# Altium PCB SIC18102  V1 8电极6005_20180920.PcbDoc (part 3 of 3)
Units mm, origin at the board's own origin, x right, y up, seen from the top; angles counter-clockwise.
Board outline 116 x 63 mm, 2 copper layers (Top Layer, Bottom Layer); 179 components, 127 nets, 387 pads, 294 vias.
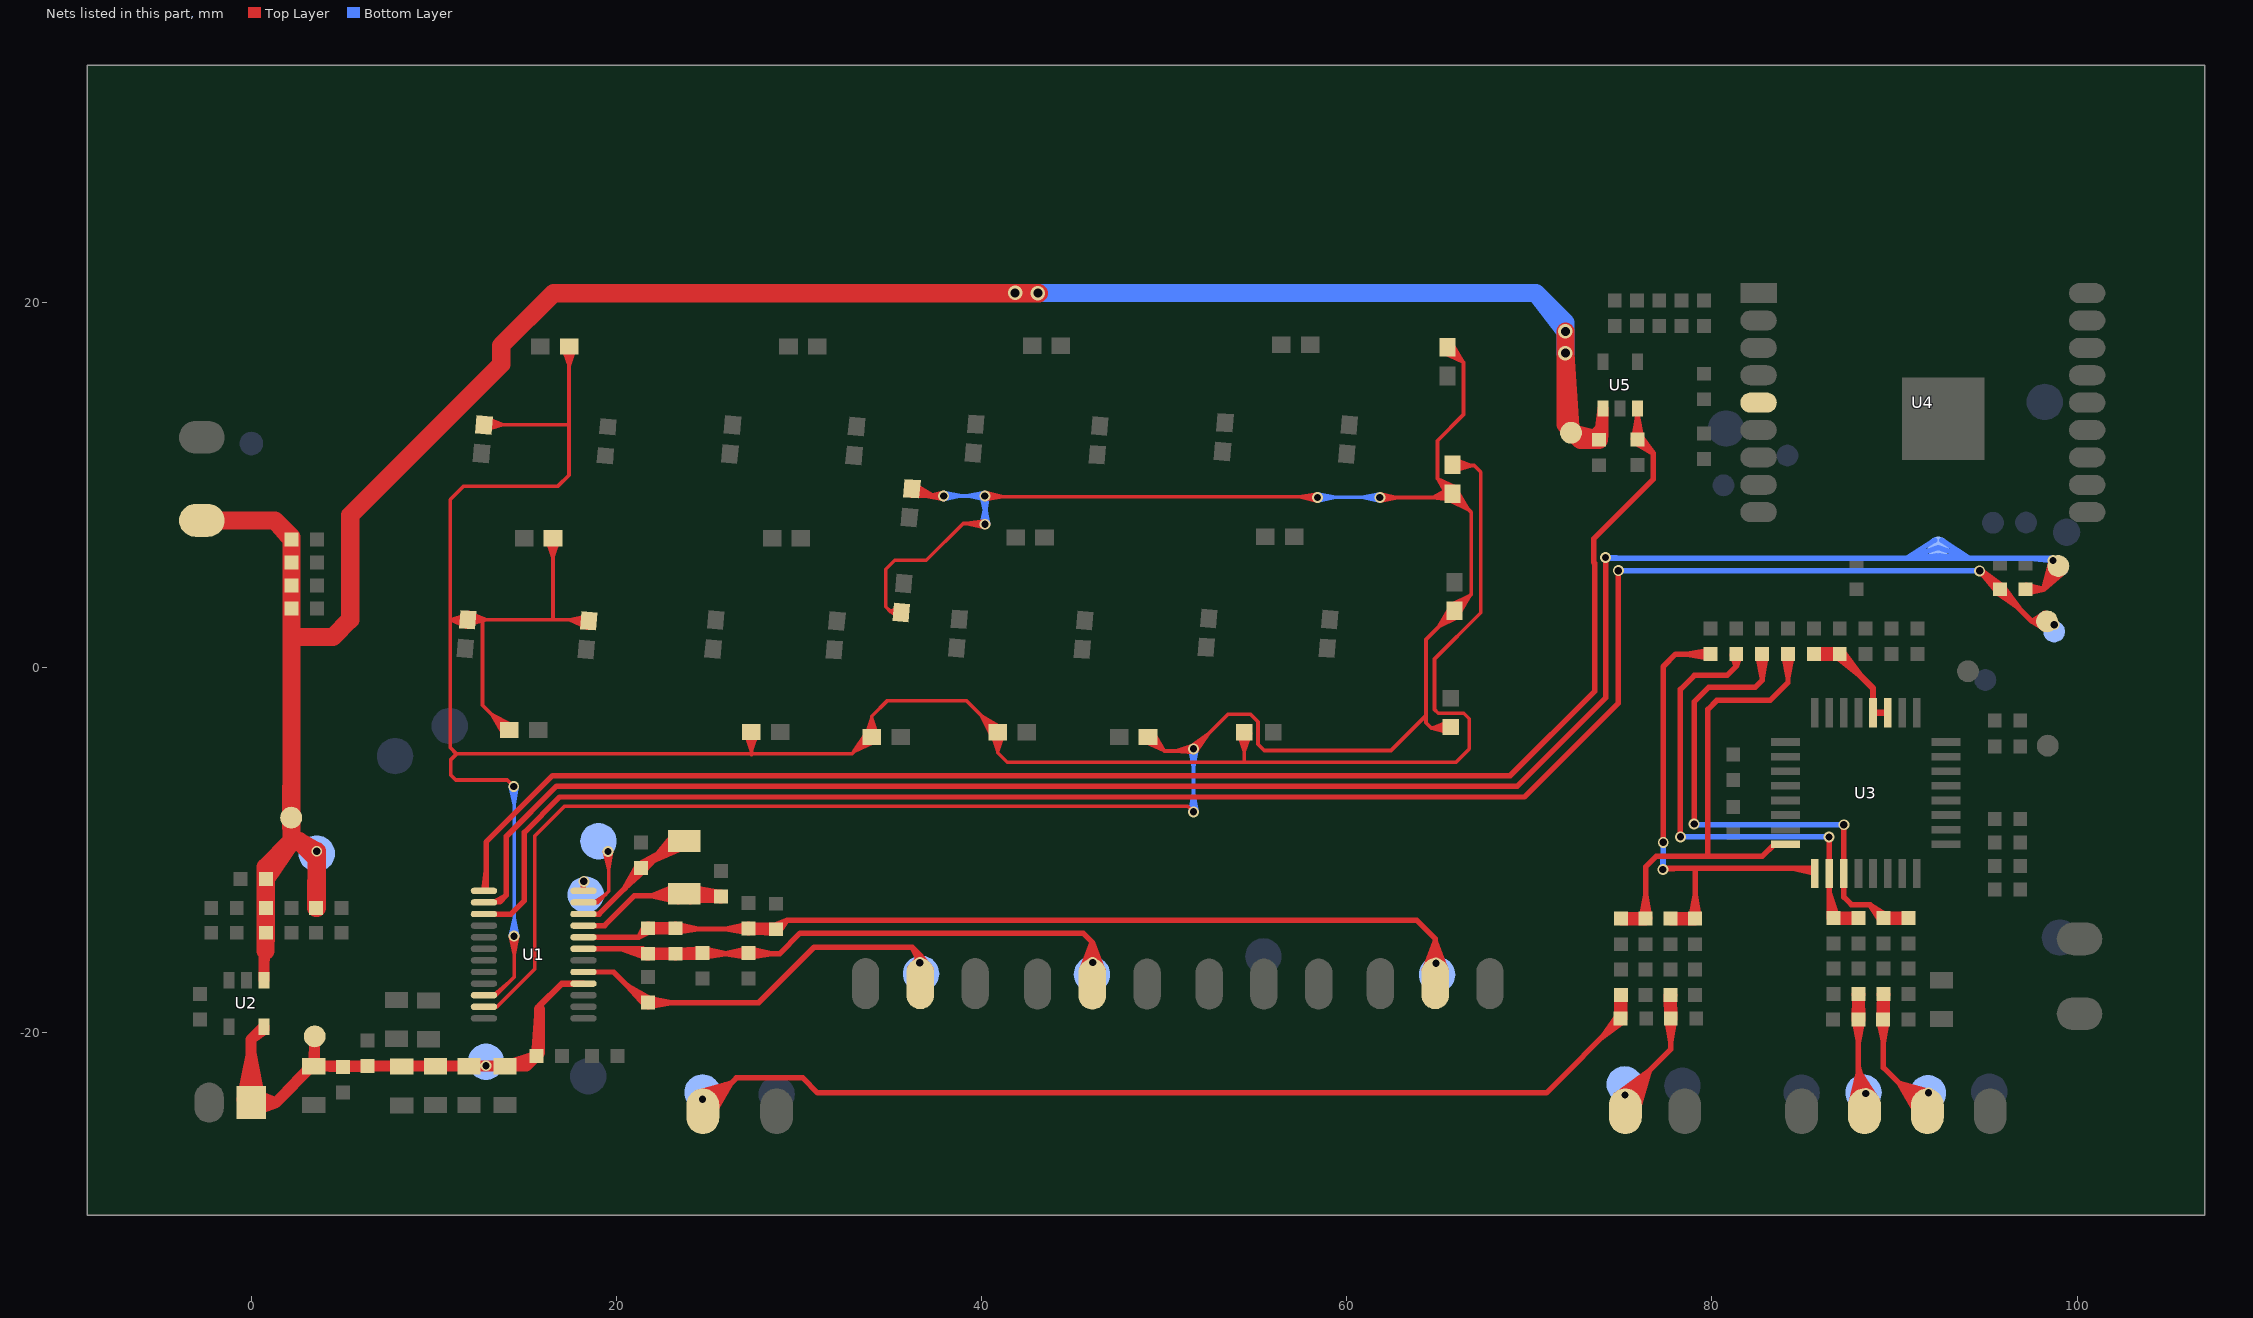
[diagram p3: the nets of this part, all layers, seen from the top]

## Via types
v1: diameter 0.6, hole 0.4, Top Layer to Bottom Layer, 288 vias
v2: diameter 0.8, hole 0.5, Top Layer to Bottom Layer, 4 vias
v3: diameter 0.5, hole 0.3, Top Layer to Bottom Layer, 2 vias

## Nets (pads, with @x,y where several pads share a name; then routed paths per layer and width w, separated by ;. In a path a pad name is that pad's centre, name@x,y a point inside that pad or via, vN(x,y) a via of type N, cw(c..) or ccw(c..) an arc to the next point about the centre after c; other vN are vias at no path point) (continued)
PT26: LED7.K LED15.K LED31.K LED39.K LED41.A LED42.A LED44.A LED45.A LED46.A LED47.K LED56.A U1.22 | length 234.3
  Top Layer w0.2: LED45.A@11.758,2.218 10.89,2.614 ; LED45.A@11.802,2.894 10.89,2.614 ; LED45.A@11.822,2.409 10.89,2.614 ; LED45.A@11.841,2.697 10.89,2.614 ; LED45.A@11.842,2.552 10.89,2.614 ; LED45.A@11.853,2.679 12.894,2.614 ; LED45.A@11.854,2.534 12.894,2.614 ; LED45.A@11.872,2.822 12.894,2.614 ; LED45.A@11.889,2.336 12.894,2.614 ; LED45.A@11.931,3.014 12.894,2.614 ; LED42.A@12.597,13.29 LED42.A@12.74,13.29 ; 12.66,2.54 12.66,-2.06 14.02,-3.42 LED47.K@14.12,-3.42 ; U1.22@12.74,-17.945 13.405,-17.945 14.39,-16.96 v1(14.39,-14.71) ; LED42.A@12.74,13.156 LED42.A@12.74,13.29 ; LED42.A@12.746,13.353 13.786,13.29 ; LED42.A@12.747,13.209 13.786,13.29 ; LED42.A@12.764,13.497 13.786,13.29 ; LED42.A@12.782,13.011 13.786,13.29 ; LED42.A@12.823,13.689 13.786,13.29 ; LED42.A@12.859,13.171 LED42.A@12.74,13.29 ; U1.22@13.29,-17.945 14.12,-17.23 ; LED47.K@13.785,-3.632 13.184,-2.584 ; LED47.K@13.95,-3.518 13.184,-2.584 ; LED47.K@14.056,-3.42 13.184,-2.584 ; LED47.K@14.15,-3.31 13.184,-2.584 ; v1@14.191,-14.73 14.39,-15.712 ; LED47.K@14.257,-3.14 13.184,-2.584 ; v1(14.37,-6.51) 14.02,-6.16 11.19,-6.16 10.93,-5.9 10.93,-5.04 11.24,-4.73 ; v1@14.39,-14.68 v1(14.39,-14.71) ; v1@14.589,-14.73 14.39,-15.712 ; LED44.A@16.18,7.023 16.52,6.036 ; LED44.A@16.376,7.07 16.52,6.036 ; LED44.A@16.664,7.07 16.52,6.036 ; LED44.A@16.86,7.023 16.52,6.036 ; LED41.A@17.06,17.523 17.4,16.536 ; LED41.A@17.256,17.57 17.4,16.536 ; 17.35,13.29 LED42.A@12.74,13.29 ; LED41.A@17.544,17.57 17.4,16.536 ; LED41.A@17.74,17.523 17.4,16.536 ; LED46.A@18.38,2.165 17.431,2.614 ; LED46.A@18.448,2.355 17.431,2.614 ; LED46.A@18.456,2.841 17.431,2.614 ; LED46.A@18.474,2.497 17.431,2.614 ; LED46.A@18.48,2.56 18.426,2.614 16.589,2.614 ; LED46.A@18.481,2.641 17.431,2.614 ; LED39.K@27.05,-3.581 27.39,-4.568 ; LED39.K@27.246,-3.534 27.39,-4.568 ; 27.39,-4.77 27.39,-4.73 ; LED39.K@27.534,-3.534 27.39,-4.568 ; LED39.K@27.73,-3.581 27.39,-4.568 ; LED15.K@33.64,-3.753 33.98,-2.766 ; LED15.K@33.656,-3.585 32.995,-4.615 ; LED15.K@33.68,-3.93 32.88,-4.73 27.39,-4.73 ; LED15.K@33.815,-3.707 32.995,-4.615 ; LED15.K@33.836,-3.8 33.98,-2.766 ; LED15.K@33.917,-3.81 32.995,-4.615 ; LED15.K@33.98,-3.81 33.98,-2.67 34.84,-1.81 39.15,-1.81 LED31.K@40.88,-3.54 ; LED15.K@34.005,-3.924 32.995,-4.615 ; LED15.K@34.104,-4.099 32.995,-4.615 ; LED15.K@34.124,-3.8 33.98,-2.766 ; LED15.K@34.32,-3.753 33.98,-2.766 ; LED31.K@40.532,-3.735 40.011,-2.671 ; LED31.K@40.54,-3.597 40.88,-4.584 ; LED31.K@40.705,-3.632 40.011,-2.671 ; LED31.K@40.736,-3.55 40.88,-4.584 ; LED31.K@40.816,-3.54 40.011,-2.671 ; LED31.K@40.916,-3.435 40.011,-2.671 ; LED31.K@41.024,-3.55 40.88,-4.584 ; LED31.K@41.032,-3.272 40.011,-2.671 ; LED31.K@41.22,-3.597 40.88,-4.584 ; LED7.K@54.049,-3.597 54.388,-4.584 ; LED7.K@54.244,-3.55 54.388,-4.584 ; LED7.K@54.533,-3.55 54.388,-4.584 ; LED7.K@54.728,-3.597 54.388,-4.584 ; LED56.A@65.79,11.1 66.835,11.065 ; LED56.A@65.795,10.956 66.835,11.065 ; LED56.A@65.805,11.244 66.835,11.065 ; LED56.A@65.835,10.758 66.835,11.065 ; LED56.A@65.858,11.438 66.835,11.065 ; LED56.A@65.882,11.065 66.98,11.065 67.339,10.706 67.339,3.009 64.799,0.469 64.799,-2.295 65.004,-2.5 66.405,-2.5 66.704,-2.799 66.704,-4.456 65.98,-5.18 54.35,-5.18 ; 10.89,2.614 16.589,2.614 ; 10.89,2.614 10.89,9.2 11.628,9.938 16.798,9.938 17.4,10.54 LED41.A@17.4,17.58 17.4,16.536 ; 10.89,2.614 10.89,-4.38 11.24,-4.73 ; 11.24,-4.73 27.39,-4.73 ; 14.39,-15.712 v1(14.39,-14.71) ; 16.52,6.036 LED44.A@16.52,7.08 16.52,2.683 16.589,2.614 ; 27.39,-4.73 LED39.K@27.39,-3.524 27.39,-4.568 ; 40.88,-4.584 LED31.K@40.88,-3.54 ; LED31.K@40.88,-3.54 40.88,-4.66 41.4,-5.18 54.35,-5.18 ; 54.35,-5.18 54.388,-5.141 LED7.K@54.388,-3.54 54.388,-4.584
  Bottom Layer w0.2: v1@14.171,-6.534 14.39,-7.512 ; v1@14.191,-14.69 14.39,-13.708 v1@14.589,-14.69 ; v1(14.37,-6.51) 14.39,-7.512 ; v1(14.39,-14.71) v1@14.39,-6.5 ; v1@14.569,-6.526 14.39,-7.512
PT27: LED8.K LED16.K LED32.K LED49.A LED52.A LED53.A LED56.K U1.23 | length 231
  Top Layer w0.2: U1.23@12.74,-18.58 13.45,-18.58 15.52,-16.51 15.52,-9.22 17.15,-7.59 51.29,-7.59 v1(51.6,-7.9) ; LED32.K@35.472,2.7 35.01,3.07 ; LED32.K@35.528,3.357 35.01,3.07 ; LED32.K@35.57,2.879 35.01,3.07 ; LED32.K@35.595,3.164 35.01,3.07 ; LED32.K@35.6,3.02 35.01,3.07 ; LED32.K@35.66,3.07 35.01,3.07 ; LED52.A@36.126,9.391 37.41,9.39 ; LED52.A@36.142,9.591 37.41,9.39 ; LED52.A@36.172,9.732 37.41,9.39 ; LED52.A@36.178,9.682 36.47,9.39 v1@37.99,9.39 ; LED52.A@36.219,9.869 37.41,9.39 ; LED52.A@36.308,10.049 37.41,9.39 ; v1@37.898,9.599 36.918,9.39 ; v1@37.902,9.201 36.918,9.39 ; v1(37.92,9.4) 36.918,9.39 ; v1@40.05,7.89 38.99,7.89 36.97,5.87 35.24,5.87 34.75,5.38 34.75,3.33 35.01,3.07 ; v1@40.152,7.652 39.177,7.89 ; v1@40.168,8.05 39.177,7.89 ; v1(40.17,9.4) 41.177,9.353 ; v1(40.18,7.85) 39.177,7.89 ; v1@40.181,9.2 41.177,9.353 ; v1@40.199,9.598 41.177,9.353 ; v1@40.379,9.353 v1@58.38,9.353 ; LED49.A@48.982,-4.096 50.004,-4.574 ; LED49.A@49.083,-3.922 50.004,-4.574 ; LED49.A@49.174,-3.81 50.004,-4.574 ; LED49.A@49.278,-3.71 50.004,-4.574 ; LED49.A@49.32,-3.89 50.004,-4.574 ; LED49.A@49.443,-3.595 50.004,-4.574 ; v1@51.471,-4.297 52.427,-3.625 ; v1@51.557,-4.255 50.583,-4.574 ; v1@51.605,-4.65 50.583,-4.574 ; v1@51.753,-4.579 52.427,-3.625 ; v1@58.369,9.121 57.393,9.353 ; v1@58.383,9.519 57.393,9.353 ; v1(58.396,9.319) 57.393,9.353 ; v1(61.81,9.31) 65.582,9.31 LED56.K@65.79,9.518 ; v1@61.83,9.111 62.812,9.31 v1@61.83,9.509 ; LED53.A@65.321,17.2 66.386,16.705 ; LED53.A@65.421,17.375 66.386,16.705 ; LED53.A@65.51,17.488 66.386,16.705 ; LED53.A@65.51,17.552 65.539,17.552 66.388,16.703 66.388,13.855 64.962,12.429 64.962,10.346 ; LED56.K@65.52,9.367 64.962,10.346 ; LED56.K@65.595,9.171 66.659,8.65 ; LED53.A@65.613,17.59 66.386,16.705 ; LED8.K@65.619,-2.929 64.649,-3.311 ; LED16.K@65.631,3.254 65.03,2.233 ; LED8.K@65.651,-3.599 64.649,-3.311 ; LED8.K@65.674,-3.123 64.649,-3.311 ; LED56.K@65.675,9.843 64.682,9.31 ; LED56.K@65.685,9.482 64.962,10.346 ; LED8.K@65.688,-3.402 64.649,-3.311 ; LED8.K@65.691,-3.262 64.649,-3.311 ; LED8.K@65.695,-3.262 65.646,-3.311 64.621,-3.311 64.332,-3.022 64.332,-2.629 ; LED56.K@65.698,9.343 66.659,8.65 ; LED16.K@65.704,3.45 66.768,3.971 ; LED56.K@65.754,9.658 64.682,9.31 ; LED53.A@65.775,17.708 66.386,16.705 ; LED56.K@65.79,9.455 66.659,8.65 ; LED56.K@65.79,9.582 64.962,10.346 ; LED16.K@65.794,3.138 65.03,2.233 ; LED56.K@65.801,9.174 64.682,9.31 ; LED16.K@65.807,3.277 66.768,3.971 ; LED56.K@65.808,9.375 64.682,9.31 ; LED56.K@65.881,9.694 64.962,10.346 ; LED56.K@65.895,9.555 66.659,8.65 ; LED16.K@65.899,3.039 65.03,2.233 ; LED16.K@65.899,3.166 66.768,3.971 ; LED56.K@65.982,9.868 64.962,10.346 ; LED16.K@65.991,2.927 65.03,2.233 ; LED16.K@66.004,3.066 66.768,3.971 ; LED56.K@66.058,9.671 66.659,8.65 ; LED16.K@66.094,2.754 65.03,2.233 ; LED16.K@66.167,2.95 66.768,3.971 ; 50.004,-4.574 51.478,-4.574 53.492,-2.56 54.727,-2.56 55.138,-2.971 55.138,-4.198 55.48,-4.54 62.421,-4.54 64.332,-2.629 ; 50.583,-4.574 v1(51.6,-4.45) 52.427,-3.625 ; 64.332,-2.629 64.332,1.535 LED16.K@65.899,3.102 66.822,4.025 66.822,8.486 LED56.K@65.79,9.518 ; 64.682,9.31 LED56.K@65.79,9.518 ; 64.962,10.346 LED56.K@65.79,9.518
  Bottom Layer w0.2: v1(37.92,9.4) v1(40.17,9.4) ; v1@37.94,9.201 38.922,9.4 v1@37.94,9.599 ; v1@39.971,9.376 40.19,8.398 ; v1@39.981,7.872 40.19,8.852 ; v1@40.15,9.201 39.168,9.4 v1@40.15,9.599 ; v1(40.18,7.85) 40.19,8.852 ; v1@40.19,7.85 40.19,9.38 v1(40.17,9.4) ; v1@40.369,9.384 40.19,8.398 ; v1@40.379,7.868 40.19,8.852 ; v1@51.401,-7.88 51.6,-6.898 v1@51.799,-7.88 ; v1@51.401,-4.47 51.6,-5.452 ; v1(51.6,-7.9) v1(51.6,-4.45) 51.6,-5.452 ; v1@51.799,-4.47 51.6,-5.452 ; v1(58.396,9.319) 61.801,9.319 v1(61.81,9.31) 60.808,9.319 ; v1@58.416,9.12 59.398,9.319 v1@58.416,9.518 ; v1@61.788,9.111 60.808,9.319 ; v1@61.792,9.509 60.808,9.319 ; v1(40.17,9.4) 40.19,8.398
PWR_CHG: ?.1@18.31,-12.44 U1.12 | length 1
  Top Layer w0.3: v1@18.19,-11.71 U1.12@18.19,-12.23 v1(18.21,-11.71)
PWR_HEAT: U4.5
PWR_WIFI: R19.2 U1.13 U5.3 | length 97.5
  Top Layer w0.3: U1.13@12.74,-12.23 12.86,-11.122 ; U1.13@12.86,-12.23 12.86,-9.56 16.5,-5.92 68.95,-5.92 73.57,-1.3 73.57,5.711 73.52,5.761 73.52,7.05 76.79,10.32 76.79,11.73 ; R19.2@75.794,12.313 76.79,11.73 ; R19.2@75.92,12.84 U5.3@75.92,14.04 ; U5.3@75.92,14.19 75.92,12.51 R19.2@75.93,12.5 ; R19.2@76.101,12.656 76.79,11.73 ; U5.3@75.92,13.781 75.7,12.519 U5.3@75.92,13.782 ; U5.3@75.92,13.781 76.16,12.523 U5.3@75.92,13.782 ; U5.3@75.92,13.781 R19.2@75.93,12.5 ; U5.3@75.92,13.782 R19.2@75.93,12.5 ; R19.2@75.93,12.5 76.02,12.5 76.79,11.73 ; R19.2@75.93,12.5 76.79,11.73
PZI: 
RCF0: 
RCF1: 
RF: 
RXD: R33.2 RXD.1 U1.15 | length 122
  Top Layer w0.3: U1.15@13.06,-13.5 14.22,-13.5 ; U1.15@13.29,-13.5 14.22,-13.5 ; 74.87,4.008 v1(74.87,5.31) 74.87,-1.95 69.73,-7.09 16.89,-7.09 14.95,-9.03 14.95,-12.77 14.22,-13.5 ; R33.2@95.558,4.198 v1(94.66,5.3) ; R33.2@95.602,4.137 v1@94.764,5.3 ; R33.2@95.628,4.11 96.795,3.269 R33.2@95.954,4.436 ; R33.2@95.818,4.541 v1(94.66,5.3) ; R33.2@95.927,4.462 v1@94.764,5.3 ; RXD.1@98.226,2.097 97.534,2.53 ; RXD.1@98.226,2.963 97.534,2.53 ; v1(94.66,5.3) v1@94.764,5.3 ; v1(94.66,5.3) 95.733,4.331 v1(94.66,5.3) ; v1@94.764,5.3 R33.2@95.778,4.286 ; v1@94.764,5.3 R33.2@95.778,4.286 ; R33.2@95.778,4.286 97.534,2.53 ; 97.534,2.53 RXD.1@98.35,2.53 97.534,2.53 ; 97.534,2.53 v1(98.74,2.35) 97.534,2.53
  Bottom Layer w0.3: v1@74.81,5.3 v1(94.66,5.3) ; v1(74.87,5.31) 76.172,5.3
S+: ?.2@46.059,-17.34 C3.2 C5.2 C6.2 C53.1 S+.1 U1.7 | length 99.3
  Top Layer w0.3: U1.7@18.19,-15.405 21.447,-15.405 C6.2@21.718,-15.676 ; U1.7@18.74,-15.405 19.815,-15.405 ; C6.2@21.658,-15.899 20.282,-15.405 ; C6.2@21.705,-15.906 C5.2@22.993,-15.866 ; C6.2@21.705,-15.445 C5.2@22.993,-15.485 ; C6.2@21.743,-15.446 20.282,-15.405 ; C6.2@21.773,-15.9 C5.2@22.993,-15.485 ; C6.2@21.773,-15.451 C5.2@22.993,-15.866 ; C5.2@23.209,-15.906 C6.2@21.949,-15.676 ; C5.2@23.209,-15.446 C6.2@21.949,-15.676 ; C5.2@23.23,-15.676 C6.2@21.949,-15.676 ; C5.2@23.25,-15.906 24.511,-15.676 C5.2@23.25,-15.446 ; C3.2@24.65,-15.407 C5.2@23.448,-15.87 ; C3.2@24.666,-15.855 C5.2@23.427,-15.478 ; C3.2@24.684,-15.4 C5.2@23.43,-15.676 ; C3.2@24.701,-15.86 C5.2@23.43,-15.676 ; C3.2@24.72,-15.398 C5.2@23.427,-15.478 ; C3.2@24.726,-15.86 25.997,-15.676 ; C3.2@24.736,-15.859 C5.2@23.448,-15.87 ; C3.2@24.743,-15.4 25.997,-15.676 ; C53.1@27.201,-15.4 25.946,-15.676 ; C53.1@27.218,-15.86 25.946,-15.676 ; C53.1@27.242,-15.86 28.513,-15.676 ; C53.1@27.259,-15.4 28.513,-15.676 ; 20.282,-15.405 C6.2@21.718,-15.676 ; C6.2@21.718,-15.676 28.934,-15.676 30.06,-14.55 45.56,-14.55 46.059,-15.049 ; C6.2@21.718,-15.676 C5.2@22.993,-15.866 ; C6.2@21.718,-15.676 C5.2@22.993,-15.485 ; C6.2@21.718,-15.676 C5.2@22.999,-15.676 ; C5.2@22.999,-15.676 21.739,-15.446 C5.2@22.999,-15.676 ; C5.2@22.999,-15.676 21.739,-15.906 C5.2@22.999,-15.676 ; C5.2@23.427,-15.478 C3.2@24.714,-15.629 ; C5.2@23.43,-15.676 C3.2@24.714,-15.629 ; C5.2@23.448,-15.87 C3.2@24.714,-15.629 ; C3.2@24.714,-15.629 25.997,-15.676 ; 25.946,-15.676 C53.1@27.23,-15.629 28.513,-15.676 ; 46.059,-15.049 ?.2@46.059,-17.34 v1(46.08,-16.15) ; 46.059,-15.049 45.469,-16.58 v1(46.08,-16.15) ; 46.059,-15.049 46.649,-16.58 v1(46.08,-16.15) ; 46.059,-15.049 45.76,-16.662 v1(46.08,-16.15) ; 46.059,-15.049 46.357,-16.662 v1(46.08,-16.15) ; 46.059,-15.049 46.059,-16.69 v1(46.08,-16.15) ; 46.059,-15.049 v1(46.08,-16.15) ; 46.059,-15.049 v1(46.08,-16.15) ; 46.059,-15.049 v1(46.08,-16.15) ; 46.059,-15.049 v1(46.08,-16.15) ; 46.059,-15.049 v1(46.08,-16.15) ; 46.059,-15.049 v1(46.08,-16.15)
S-: ?.2@64.84,-17.314 C4.2 C5.1 C6.1 C52.1 S-.1 U1.8 | length 118.1
  Top Layer w0.3: U1.8@18.19,-14.77 21.227,-14.77 ; U1.8@18.74,-14.77 19.815,-14.77 ; C6.1@21.53,-14.145 21.227,-14.77 ; C6.1@21.705,-14.509 C5.1@22.993,-14.469 ; C6.1@21.705,-14.048 C5.1@22.993,-14.088 ; C6.1@21.773,-14.503 C5.1@22.993,-14.088 ; C6.1@21.773,-14.054 C5.1@22.993,-14.469 ; C6.1@21.852,-14.467 21.227,-14.77 ; C5.1@23.209,-14.509 C6.1@21.949,-14.279 ; C5.1@23.209,-14.049 C6.1@21.949,-14.279 ; C5.1@23.243,-14.509 24.513,-14.32 ; C5.1@23.258,-14.05 24.513,-14.32 ; C4.2@27.204,-14.06 25.948,-14.32 ; C4.2@27.215,-14.52 25.948,-14.32 ; C4.2@27.245,-14.52 C52.1@28.512,-14.32 ; C4.2@27.256,-14.06 C52.1@28.512,-14.32 ; C52.1@28.609,-14.138 29.34,-13.83 ; C52.1@28.667,-14.558 C4.2@27.461,-14.103 ; C52.1@28.681,-14.109 C4.2@27.449,-14.488 ; C52.1@28.701,-14.565 C4.2@27.448,-14.295 ; C52.1@28.705,-14.565 C4.2@27.448,-14.32 ; C52.1@28.711,-14.105 C4.2@27.448,-14.32 ; C52.1@28.715,-14.105 C4.2@27.448,-14.295 ; C52.1@28.729,-14.495 28.729,-14.441 29.34,-13.83 ; C52.1@28.73,-14.32 23.271,-14.32 C5.1@23.23,-14.279 ; C52.1@28.736,-14.566 C4.2@27.449,-14.488 ; C52.1@28.75,-14.105 C4.2@27.461,-14.103 ; C52.1@28.9,-14.49 29.34,-13.83 ; ?.2@64.25,-16.555 64.84,-15.014 ; 64.84,-14.887 v1(64.88,-16.19) ; 21.227,-14.77 C6.1@21.718,-14.279 ; 21.227,-14.77 C6.1@21.718,-14.279 ; C6.1@21.718,-14.279 C5.1@23.23,-14.279 ; C6.1@21.718,-14.279 C5.1@22.993,-14.469 ; C6.1@21.718,-14.279 C5.1@22.993,-14.088 ; C6.1@21.718,-14.279 C5.1@22.999,-14.279 ; C6.1@21.949,-14.279 C5.1@23.23,-14.279 ; C5.1@22.999,-14.279 21.739,-14.049 C5.1@22.999,-14.279 ; C5.1@22.999,-14.279 21.739,-14.509 C5.1@22.999,-14.279 ; C5.1@23.23,-14.279 24.513,-14.32 ; 25.948,-14.32 C4.2@27.23,-14.29 C52.1@28.512,-14.32 ; C4.2@27.448,-14.32 C52.1@28.729,-14.335 ; C4.2@27.448,-14.295 C52.1@28.729,-14.335 ; C4.2@27.449,-14.488 C52.1@28.729,-14.335 ; C4.2@27.461,-14.103 C52.1@28.729,-14.335 ; C52.1@28.729,-14.335 29.34,-13.83 ; 29.34,-13.83 63.82,-13.83 64.84,-14.85 ?.2@64.84,-17.314 v1(64.88,-16.19) ; 64.84,-15.014 65.43,-16.555 v1(64.88,-16.19) ; 64.84,-15.014 64.541,-16.637 v1(64.88,-16.19) ; 64.84,-15.014 65.139,-16.637 v1(64.88,-16.19) ; 64.84,-15.014 64.84,-16.664 v1(64.88,-16.19) ; 64.84,-15.014 v1(64.88,-16.19) ; 64.84,-15.014 v1(64.88,-16.19) ; 64.84,-15.014 v1(64.88,-16.19) ; 64.84,-15.014 v1(64.88,-16.19)
SCANTEST: 
SIN0: 
SIN1: 
SIN-1: 
SS: 
STAT: ?.1@19.01,-9.51 U1.11 | length 8
  Top Layer w0.2: U1.11@18.19,-12.865 18.965,-12.865 ; v1@19.332,-10.1 19.58,-11.074 ; 19.4,-12.43 U1.11@18.74,-12.865 ; v1(19.53,-10.07) 19.58,-11.074 ; v1@19.58,-10.13 19.58,-12.25 18.965,-12.865 ; v1@19.73,-10.08 19.58,-11.074 ; U1.11@18.74,-12.865 18.965,-12.865 ; U1.11@18.74,-12.865 18.965,-12.865
TXD: R34.1 TXD.1 U1.14 | length 127.6
  Top Layer w0.3: U1.14@13.07,-12.83 13.61,-12.83 ; 74.17,4.728 v1(74.17,6.03) 74.17,-1.66 69.34,-6.49 16.72,-6.49 13.97,-9.24 13.97,-12.47 ; R34.1@97.175,4.286 98.156,4.286 ; R34.1@97.202,4.057 98.156,4.286 ; R34.1@97.202,4.516 98.156,4.286 ; 98.243,4.601 v1(98.68,5.86) 98.251,4.434 ; TXD.1@98.559,5.743 98.156,4.286 ; TXD.1@98.97,5.56 98.156,4.286 ; TXD.1@99.03,5.16 98.156,4.286 ; TXD.1@99.309,5.264 98.156,4.286 ; U1.14@13.29,-12.865 13.61,-12.83 ; U1.14@13.29,-12.865 13.97,-12.47 ; U1.14@13.29,-12.865 13.61,-12.83 ; 13.61,-12.83 13.97,-12.47
  Bottom Layer w0.3: v1(74.17,6.03) 75.476,5.98 ; v1@74.27,5.98 98.56,5.98 v1(98.68,5.86) 97.355,5.98 ; TXD.1@92.193,6.975 90.662,5.98 ; TXD.1@92.297,6.13 94.092,5.98 ; TXD.1@92.482,6.129 90.662,5.98 ; TXD.1@92.589,6.973 94.092,5.98 ; 90.662,5.98 TXD.1@92.39,6.57 94.092,5.98
V0L: 
V1L: 
VBAIS: C18.1 R39.1 U3.3 U3.4 | length 27.9
  Top Layer w0.35: C18.1@86.859,0.58 88.092,-0.412 ; C18.1@86.954,0.531 R39.1@85.596,0.937 ; C18.1@86.954,0.933 R39.1@85.596,0.527 ; C18.1@86.983,0.527 R39.1@85.58,0.732 ; C18.1@86.983,0.937 R39.1@85.58,0.732 ; C18.1@87.013,0.527 R39.1@85.596,0.527 ; C18.1@87.013,0.937 R39.1@85.596,0.937 ; C18.1@87.156,0.864 88.092,-0.412 ; U3.4@88.82,-1.89 88.82,-1.14 ; R39.1@85.58,0.732 C18.1@86.948,0.732 ; R39.1@85.58,0.732 C18.1@86.998,0.732 ; R39.1@85.596,0.527 C18.1@86.948,0.732 ; R39.1@85.596,0.527 C18.1@86.998,0.732 ; R39.1@85.596,0.937 C18.1@86.948,0.732 ; R39.1@85.596,0.937 C18.1@86.998,0.732 ; C18.1@86.948,0.732 88.82,-1.14 ; C18.1@86.998,0.732 88.092,-0.412 ; U3.4@88.82,-2.48 88.82,-1.14 ; U3.4@88.82,-2.48 U3.3@89.62,-2.48 U3.4@88.82,-2.48
vcc: 
VDD: AVDD.1 C1.1 C13.2 C14.2 C15.2 C37.2 C38.2 C48.1 C51.2 R3.2 U1.4 U2.5 VDD.1 | length 106.3
  Top Layer w0.35: 15.78,-18.71 15.78,-18.53 17,-17.31 17.18,-17.31 ; U1.4@17.64,-17.31 17.18,-17.31 ; U1.4@18.19,-17.31 17.18,-17.31
  Top Layer w0.6: C48.1@-0.508,-23.682 -0.01,-21.13 ; C48.1@-0.01,-23.73 -0.01,-21.13 ; C48.1@0.083,-24.321 1.34,-23.83 ; C48.1@0.083,-23.339 1.34,-23.83 ; C48.1@0.488,-23.682 -0.01,-21.13 ; U2.5@0.68,-19.82 -0.01,-20.36 ; U2.5@0.68,-19.67 -0.01,-20.36 ; 1.649,-23.521 C14.2@3.229,-21.835 ; 7.213,-21.835 C13.2@5.03,-21.873 ; C51.2@7.645,-21.836 9.889,-21.836 8.424,-21.855 C15.2@10.669,-21.835 ; C51.2@8.541,-21.835 R3.2@6.36,-21.83 ; C15.2@9.49,-21.836 11.735,-21.836 10.27,-21.836 C37.2@12.515,-21.835 ; C15.2@10.645,-21.836 v1(12.85,-21.81) ; C15.2@10.648,-21.835 v1(12.85,-21.81) ; 15.78,-19.057 C1.1@15.625,-21.274 ; 15.78,-18.71 15.78,-21.118 15.063,-21.836 ; -0.01,-20.36 C48.1@-0.01,-23.83 1.34,-23.83 ; 1.34,-23.83 3.335,-21.835 C14.2@3.42,-21.835 ; C14.2@3.42,-21.835 C38.2@13.93,-21.835 ; C14.2@3.42,-21.835 3.47,-21.785 AVDD.1@3.47,-20.2 C14.2@3.42,-21.835 ; C14.2@3.42,-21.835 C13.2@5.03,-21.873 ; 4.179,-21.835 R3.2@6.36,-21.83 ; 4.179,-21.835 R3.2@6.36,-21.83 ; 4.179,-21.835 C13.2@5.03,-21.873 ; 4.179,-21.835 C13.2@5.03,-21.873 ; C13.2@5.03,-21.873 5.855,-21.835 ; C13.2@5.03,-21.873 3.61,-21.835 5.855,-21.835 ; C13.2@5.03,-21.873 R3.2@6.36,-21.83 ; C13.2@5.03,-21.873 R3.2@6.36,-21.83 ; 5.855,-21.835 R3.2@6.36,-21.83 ; R3.2@6.36,-21.83 8.043,-21.855 5.799,-21.835 R3.2@6.36,-21.83 ; C37.2@12.116,-21.836 C38.2@13.708,-21.836 ; C37.2@12.116,-21.836 C38.2@13.93,-21.835 ; C37.2@12.116,-21.836 v1(12.85,-21.81) ; C37.2@12.116,-21.836 v1(12.85,-21.81) ; v1(12.85,-21.81) C38.2@13.708,-21.836 ; v1(12.85,-21.81) 11.463,-21.835 C38.2@13.708,-21.836 ; v1(12.85,-21.81) C38.2@13.708,-21.836 ; v1(12.85,-21.81) C38.2@13.93,-21.835 ; v1(12.85,-21.81) C38.2@13.93,-21.835 ; 15.063,-21.836 C38.2@13.898,-21.836 C1.1@15.625,-21.274 ; 15.063,-21.836 14.089,-21.836 C1.1@15.625,-21.274 ; 15.063,-21.836 C1.1@15.625,-21.274 ; 15.063,-21.836 C1.1@15.625,-21.274 ; 15.063,-21.836 C1.1@15.625,-21.274
VIN: C12.2 C22.2 C32.2 C35.2 C39.2 C49.2 C50.2 R1.2 R30.1 U2.1 U5.1 VBAT.1 VIN.1 | length 232
  Top Layer w0.6: U2.1@0.68,-17.12 0.68,-15.1 ; U2.1@0.68,-16.97 0.68,-15.1 ; 0.68,-15.1 0.77,-15.01 C49.2@0.806,-14.526 ; 0.68,-15.1 C49.2@0.806,-14.526 ; 0.68,-15.1 C49.2@0.806,-14.526 ; 0.68,-15.1 C49.2@0.806,-14.526 ; C49.2@0.806,-14.526 0.68,-16.722 C49.2@0.806,-14.526 ; C22.2@73.805,12.476 C22.2@74.02,12.69 ; C22.2@73.805,12.476 U5.1@74.02,14.19 C22.2@74.02,12.69 ; C22.2@73.805,12.476 74.02,14.04 C22.2@74.02,12.69 ; C22.2@73.805,12.476 74.013,13.197 73.292,12.476 C22.2@73.805,12.476
  Top Layer w1: VBAT.1@-2.71,8.058 1.282,8.058 ; VBAT.1@-2.36,8.058 1.282,8.058 ; 0.77,-11.144 C49.2@0.806,-14.526 ; 2.195,-4.62 VBAT.1@2.18,-8.22 2.195,-9.515 ; 2.195,3.627 C39.2@2.195,7.008 1.282,8.058 ; 38.328,20.5 v2(41.83,20.52) ; v2(71.97,18.41) 71.97,13.31 72.35,12.93 72.804,12.476 ; 72.224,13.535 v2(71.97,17.22) 71.97,16.625 VIN.1@72.28,12.86 ; 0.77,-15.53 0.77,-10.94 ; 0.77,-15.53 C12.2@0.806,-13.172 ; 0.77,-15.53 C49.2@0.806,-14.526 ; 0.77,-15.53 C49.2@0.806,-14.526 ; 0.77,-14.962 R30.1@0.801,-11.58 ; 0.77,-14.962 C12.2@0.806,-13.172 ; 0.77,-14.962 C49.2@0.806,-14.526 ; 0.77,-14.962 C49.2@0.806,-14.526 ; 0.77,-10.94 2.195,-9.515 ; 0.77,-10.94 R30.1@0.801,-11.58 ; 0.77,-10.94 R30.1@0.801,-11.58 ; 0.77,-10.94 C12.2@0.806,-13.172 ; R30.1@0.801,-11.58 2.195,-9.515 ; R30.1@0.801,-11.58 C12.2@0.806,-13.172 ; R30.1@0.801,-11.58 C49.2@0.806,-14.526 ; C49.2@0.806,-14.526 C12.2@0.806,-13.172 ; C49.2@0.806,-14.526 C12.2@0.806,-13.172 ; 1.282,8.058 2.195,7.145 2.195,1.67 ; 2.195,-9.515 2.195,1.67 ; 2.195,-9.515 2.625,-9.515 ; 2.195,1.67 4.46,1.67 5.41,2.62 5.41,8.34 13.68,16.61 13.68,17.63 16.55,20.5 43.13,20.5 v2(41.83,20.52) ; 2.625,-9.515 3.6,-10.49 ; 2.625,-9.515 v1(3.58,-10.06) ; v1(3.58,-10.06) 3.6,-10.49 ; v1(3.58,-10.06) 3.6,-13.172 3.6,-10.49 ; v1(3.58,-10.06) 3.6,-10.49 ; v1(3.58,-10.06) R1.2@3.55,-13.172 3.6,-10.49 ; v1(3.58,-10.06) 3.6,-10.49 ; v2(41.83,20.52) v2(43.08,20.51) 39.578,20.5 v2(41.83,20.52) ; VIN.1@72.28,12.86 C22.2@73.805,12.476 ; VIN.1@72.28,12.86 C22.2@73.805,12.476 ; 72.804,12.476 C22.2@73.805,12.476 ; 72.804,12.476 C22.2@73.805,12.476
  Bottom Layer w1: 46.582,20.52 v2(43.08,20.51) v2(41.83,20.52) 70.35,20.52 ; 70.35,20.52 71.97,18.9 ; 70.35,20.52 v2(71.97,18.41) ; v2(71.97,18.41) 71.97,17.23 71.97,18.9 ; v2(71.97,18.41) v2(71.97,17.22) 71.97,18.9
VPP0: 
VRES0: 
VRES1: 
VS: ?.2@36.638,-17.314 C2.2 U1.5 VS.1 | length 40.9
  Top Layer w0.3: U1.5@18.19,-16.675 19.845,-16.675 21.52,-18.35 27.79,-18.35 30.83,-15.31 36.19,-15.31 ; U1.5@18.74,-16.675 19.815,-16.675 ; C2.2@21.558,-18.51 20.607,-17.437 ; C2.2@21.738,-18.573 22.999,-18.35 ; C2.2@21.74,-18.113 22.999,-18.35 ; C2.2@21.849,-18.153 20.607,-17.437 ; 20.607,-17.437 C2.2@21.718,-18.343 22.999,-18.35 ; 36.19,-15.31 36.638,-15.758 ; 36.19,-15.31 v1(36.61,-16.16) ; v1(36.61,-16.16) ?.2@36.638,-17.314 36.638,-15.758 ; v1(36.61,-16.16) 36.072,-16.465 36.638,-15.758 ; v1(36.61,-16.16) 36.343,-16.615 36.638,-15.758 ; v1(36.61,-16.16) 36.934,-16.615 36.638,-15.758 ; v1(36.61,-16.16) 36.638,-16.664 36.638,-15.758 ; v1(36.61,-16.16) 37.205,-16.465 36.638,-15.758
VS0: C40.1 R12.1 R42.2 U3.19 | length 55.4
  Top Layer w0.3: v1(79.02,-8.57) 79.02,-1.88 79.83,-1.07 82.38,-1.07 82.744,-0.706 R12.1@82.744,0.732 82.744,-0.549 ; R12.1@82.514,0.711 82.744,-0.549 ; R12.1@82.975,0.711 82.744,-0.549 ; U3.19@87.22,-11.87 87.22,-12.58 ; U3.19@87.22,-10.69 87.22,-9.58 ; 87.22,-9.912 v1(87.22,-8.61) ; v1@87.22,-8.65 U3.19@87.22,-11.28 87.22,-12.58 ; R42.2@89.212,-13.869 88.658,-12.99 ; R42.2@89.414,-13.955 90.674,-13.725 R42.2@89.414,-13.495 ; R42.2@89.537,-13.544 88.658,-12.99 ; C40.1@90.703,-13.948 R42.2@89.493,-13.509 ; C40.1@90.703,-13.501 R42.2@89.493,-13.94 ; C40.1@90.741,-13.955 R42.2@89.481,-13.725 ; C40.1@90.741,-13.495 R42.2@89.481,-13.725 ; C40.1@90.78,-13.955 R42.2@89.493,-13.94 ; C40.1@90.78,-13.494 R42.2@89.493,-13.509 ; 87.22,-12.58 87.63,-12.99 88.658,-12.99 ; 88.658,-12.99 R42.2@89.393,-13.725 ; 88.658,-12.99 R42.2@89.393,-13.725 ; R42.2@89.393,-13.725 C40.1@90.762,-13.725 ; R42.2@89.481,-13.725 C40.1@90.762,-13.725 ; R42.2@89.493,-13.94 C40.1@90.762,-13.725 ; R42.2@89.493,-13.509 C40.1@90.762,-13.725
  Bottom Layer w0.3: v1@78.95,-8.61 v1(87.22,-8.61) 85.918,-8.61 ; v1(79.02,-8.57) 80.323,-8.61
VS1: C41.1 R13.1 R43.2 U3.18 | length 52.1
  Top Layer w0.3: v1(78.27,-9.27) 78.27,-1.2 79.04,-0.43 80.83,-0.43 81.327,0.067 ; R13.1@81.099,0.692 81.327,0.067 ; R13.1@81.327,0.732 81.327,0.067 ; R13.1@81.554,0.692 81.327,0.067 ; 86.42,-12.98 U3.18@86.42,-11.87 ; U3.18@86.42,-10.69 86.42,-9.58 ; v1@86.42,-9.34 U3.18@86.42,-11.28 86.42,-13.49 R43.2@86.654,-13.725 ; R43.2@86.424,-13.744 86.42,-12.344 ; R43.2@86.675,-13.955 87.935,-13.725 R43.2@86.675,-13.495 ; R43.2@86.878,-13.667 86.42,-12.344 ; C41.1@87.965,-13.948 R43.2@86.755,-13.509 ; C41.1@87.965,-13.501 R43.2@86.755,-13.94 ; C41.1@88.003,-13.955 86.742,-13.725 C41.1@88.003,-13.495 ; C41.1@88.042,-13.955 R43.2@86.755,-13.94 ; C41.1@88.042,-13.494 R43.2@86.755,-13.509 ; 86.42,-12.344 R43.2@86.654,-13.725 ; R43.2@86.654,-13.725 C41.1@88.023,-13.725 ; R43.2@86.755,-13.94 C41.1@88.023,-13.725 ; R43.2@86.755,-13.509 C41.1@88.023,-13.725 ; v1(86.41,-9.28) 86.42,-10.582 v1(86.41,-9.28)
  Bottom Layer w0.3: v1(78.27,-9.27) 79.572,-9.28 ; v1@78.28,-9.28 v1(86.41,-9.28) 85.108,-9.28
VS2: C42.1 R14.1 R44.2 U3.17 | length 51.8
  Top Layer w0.3: v1@77.28,-10.98 79.65,-10.98 ; v1(77.31,-11.06) 78.617,-10.98 ; v1(77.33,-9.57) 77.33,0.05 78.012,0.732 R14.1@79.909,0.732 ; R44.2@77.718,-13.756 C42.1@79.073,-13.756 ; R44.2@77.738,-13.986 78.999,-13.756 R44.2@77.738,-13.526 ; C42.1@78.843,-13.735 79.073,-12.475 C42.1@79.303,-13.735 ; C42.1@79.014,-13.979 R44.2@77.805,-13.538 ; C42.1@79.014,-13.533 R44.2@77.805,-13.974 ; C42.1@79.052,-13.986 77.792,-13.756 C42.1@79.052,-13.526 ; C42.1@79.092,-13.986 R44.2@77.805,-13.974 ; C42.1@79.092,-13.526 R44.2@77.805,-13.538 ; R14.1@79.888,0.502 78.628,0.732 R14.1@79.888,0.962 ; 84.328,-10.98 U3.17@85.62,-11.28 85.62,-11.05 85.55,-10.98 79.65,-10.98 ; R44.2@77.805,-13.974 C42.1@79.073,-13.756 ; R44.2@77.805,-13.538 C42.1@79.073,-13.756 ; C42.1@79.073,-13.756 79.073,-10.98 79.65,-10.98
  Bottom Layer w0.3: v1@77.313,-10.872 v1(77.33,-9.57) ; v1@77.33,-10.872 v1(77.33,-9.57) ; v1@77.33,-9.758 v1(77.31,-11.06) 77.33,-11.04 v1(77.33,-9.57)
VS3: C43.1 R15.1 R45.2 U3.16 | length 45.9
  Top Layer w0.3: R45.2@75.007,-13.756 C43.1@76.362,-13.756 ; R45.2@75.028,-13.986 76.288,-13.756 R45.2@75.028,-13.526 ; C43.1@76.132,-13.735 76.362,-12.475 C43.1@76.592,-13.735 ; C43.1@76.303,-13.979 R45.2@75.094,-13.538 ; C43.1@76.303,-13.533 R45.2@75.094,-13.974 ; C43.1@76.341,-13.986 75.081,-13.756 C43.1@76.341,-13.526 ; C43.1@76.381,-13.986 R45.2@75.094,-13.974 ; C43.1@76.381,-13.526 R45.2@75.094,-13.538 ; 79.64,-10.33 82.76,-10.33 ; U3.16@83.43,-9.68 82.76,-10.33 ; R15.1@83.932,0.711 84.162,-0.549 R15.1@84.392,0.711 ; U3.16@84.02,-9.68 83.41,-9.68 82.76,-10.33 ; R15.1@84.162,0.732 84.162,-0.828 83.19,-1.8 80.26,-1.8 79.77,-2.29 79.77,-10.23 79.67,-10.33 76.95,-10.33 76.362,-10.918 C43.1@76.362,-13.756 ; R45.2@75.094,-13.974 C43.1@76.362,-13.756 ; R45.2@75.094,-13.538 C43.1@76.362,-13.756
VSEN0: R8.2 R46.1 VIL.1 | length 37.8
  Top Layer w0.3: R46.1@89.141,-19.289 R8.2@89.181,-18.002 ; R46.1@89.142,-19.3 89.393,-20.556 ; R46.1@89.142,-19.25 R8.2@89.393,-17.994 ; R46.1@89.149,-19.213 R8.2@89.603,-18.009 ; R8.2@89.163,-17.899 89.393,-19.159 R8.2@89.623,-17.899 ; R8.2@89.393,-17.878 89.393,-21.913 91.784,-24.304 VIL.1@91.797,-24.304 ; R46.1@89.596,-19.22 R8.2@89.181,-18.002 ; R46.1@89.602,-19.296 R8.2@89.603,-18.009 ; R46.1@89.602,-19.292 89.393,-20.556 ; R46.1@89.602,-19.258 R8.2@89.393,-17.994 ; 90.565,-22.914 v1(91.858,-23.289) 90.6,-22.869 ; VIL.1@91.235,-24.45 90.256,-22.776 ; VIL.1@91.484,-24.277 90.256,-22.776 ; VIL.1@91.797,-23.954 90.256,-22.776 ; VIL.1@92.027,-23.567 90.256,-22.776 ; VIL.1@92.128,-23.281 90.256,-22.776 ; R8.2@89.181,-18.002 R46.1@89.372,-19.275 ; R46.1@89.372,-19.275 R8.2@89.603,-18.009 ; R46.1@89.372,-19.275 R8.2@89.393,-17.994 ; R46.1@89.372,-19.275 89.393,-20.556
VSEN1: R9.2 R47.1 VIR.1 | length 41.5
  Top Layer w0.3: VIR.1@87.604,-23.936 88.023,-22.101 ; R9.2@87.793,-17.899 88.023,-19.159 R9.2@88.254,-17.899 ; R47.1@87.795,-19.293 R9.2@87.813,-18.006 ; R47.1@87.796,-19.295 88.023,-20.556 ; R47.1@87.796,-19.255 R9.2@88.023,-17.994 ; R47.1@87.802,-19.217 R9.2@88.234,-18.005 ; VIR.1@87.904,-23.979 88.023,-22.101 ; VIR.1@88.023,-23.974 VIR.1@88.353,-24.304 ; 88.023,-21.88 v1(88.428,-23.329) ; R9.2@88.023,-17.878 88.023,-23.694 v1(88.428,-23.329) ; R47.1@88.249,-19.217 R9.2@87.813,-18.006 ; R47.1@88.256,-19.296 88.023,-20.556 ; R47.1@88.256,-19.292 R9.2@88.234,-18.005 ; R47.1@88.256,-19.254 R9.2@88.023,-17.994 ; R9.2@87.813,-18.006 R47.1@88.026,-19.275 ; 88.023,-22.101 89.051,-23.678 v1(88.428,-23.329) ; 88.023,-22.101 88.784,-23.823 v1(88.428,-23.329) ; 88.023,-22.101 88.353,-23.954 v1(88.428,-23.329) ; 88.023,-22.101 v1(88.428,-23.329) ; 88.023,-22.101 v1(88.428,-23.329) ; 88.023,-22.101 v1(88.428,-23.329) ; 88.023,-20.556 R47.1@88.026,-19.275 ; R9.2@88.023,-17.994 R47.1@88.026,-19.275 ; R47.1@88.026,-19.275 R9.2@88.234,-18.005
VSEN2: R10.2 R48.1 VL.1 | length 43.5
  Top Layer w0.3: VL.1@74.914,-23.662 76.567,-22.073 ; VL.1@75.649,-24.174 76.567,-22.073 ; VL.1@75.934,-24.276 76.567,-22.073 ; 76.266,-22.362 v1(75.238,-23.409) ; 76.268,-22.293 v1(75.238,-23.409) ; 76.272,-22.368 v1(75.238,-23.409) ; 76.361,-22.369 v1(75.238,-23.409) ; R10.2@77.488,-17.945 R48.1@77.718,-19.194 ; R48.1@77.513,-19.244 R10.2@77.49,-17.955 ; R48.1@77.513,-19.24 77.743,-20.5 R48.1@77.973,-19.24 ; R48.1@77.513,-19.203 R10.2@77.718,-17.938 ; R48.1@77.519,-19.162 R10.2@77.947,-17.949 ; R10.2@77.718,-17.924 R48.1@77.718,-19.194 ; 77.743,-20.897 75.256,-23.384 VL.1@75.256,-24.304 v1(75.238,-23.409) ; 77.743,-20.88 R48.1@77.743,-19.219 ; R10.2@77.948,-17.945 R48.1@77.718,-19.194 ; R48.1@77.965,-19.154 R10.2@77.49,-17.955 ; R48.1@77.973,-19.194 R10.2@77.718,-17.938 ; R48.1@77.973,-19.235 R10.2@77.947,-17.949 ; v1(75.238,-23.409) 75.256,-23.954 76.567,-22.073 ; v1(75.238,-23.409) 74.719,-23.43 76.567,-22.073 ; R10.2@77.49,-17.955 R48.1@77.743,-19.219 ; R48.1@77.718,-19.194 R48.1@77.743,-19.219 ; R10.2@77.718,-17.938 R48.1@77.743,-19.219 ; R48.1@77.743,-19.219 R10.2@77.947,-17.949
VSEN3: R11.1 R49.1 VR.1 | length 91.9
  Top Layer w0.3: VR.1@24.395,-23.283 26.266,-22.768 ; VR.1@24.498,-23.568 26.266,-22.768 ; VR.1@24.73,-24.304 26.56,-22.474 30.204,-22.474 31.02,-23.29 70.929,-23.29 R49.1@75,-19.219 ; VR.1@24.73,-23.954 26.266,-22.768 ; VR.1@25.044,-24.276 26.266,-22.768 ; VR.1@25.294,-24.448 26.266,-22.768 ; 25.894,-22.936 v1(24.71,-23.64) ; 25.965,-23 v1(24.71,-23.64) ; 25.965,-22.851 v1(24.71,-23.64) ; R49.1@74.77,-19.238 R11.1@74.778,-17.952 ; R11.1@74.777,-17.945 R49.1@75.007,-19.205 ; R49.1@74.777,-19.157 R11.1@75.235,-17.953 ; R49.1@74.824,-19.069 73.982,-20.237 ; R49.1@75.15,-19.395 73.982,-20.237 ; R49.1@75.223,-19.159 R11.1@74.778,-17.952 ; R49.1@75.23,-19.241 R11.1@75.235,-17.953 ; R11.1@75.237,-17.945 R49.1@75.007,-19.205 ; 73.982,-20.237 R49.1@75,-19.219 ; R11.1@74.778,-17.952 R49.1@75,-19.219 ; R49.1@75,-19.219 75.007,-19.212 R11.1@75.007,-17.924 R49.1@75.007,-19.205 ; R49.1@75,-19.219 R11.1@75.007,-17.938 ; R49.1@75,-19.219 R11.1@75.235,-17.953 ; R49.1@75,-19.219 R11.1@75.007,-17.938 ; R11.1@75.007,-17.938 74.77,-19.197 R11.1@75.007,-17.938 ; R11.1@75.007,-17.938 75.23,-19.2 R11.1@75.007,-17.938
XIN: 
XINL: C7.2 U1.9 Y1.2 | length 33.4
  Top Layer w0.3: U1.9@18.19,-14.135 19.345,-14.135 ; U1.9@18.74,-14.135 19.345,-14.135 ; Y1.2@23.308,-11.952 21.906,-12.51 ; Y1.2@23.378,-12.839 21.906,-12.51 ; Y1.2@23.41,-12.39 21.906,-12.51 ; Y1.2@24.01,-12.39 C7.2@25.512,-12.51 ; Y1.2@24.042,-12.839 C7.2@25.512,-12.51 ; Y1.2@24.112,-11.952 C7.2@25.512,-12.51 ; C7.2@25.633,-12.757 Y1.2@24.497,-12.105 ; C7.2@25.674,-12.323 Y1.2@24.446,-12.749 ; C7.2@25.687,-12.774 Y1.2@24.452,-12.425 ; C7.2@25.703,-12.776 Y1.2@24.448,-12.51 ; C7.2@25.716,-12.316 Y1.2@24.448,-12.51 ; C7.2@25.731,-12.316 Y1.2@24.452,-12.425 ; C7.2@25.745,-12.777 Y1.2@24.446,-12.749 ; C7.2@25.75,-12.51 20.97,-12.51 19.345,-14.135 ; C7.2@25.788,-12.324 Y1.2@24.497,-12.105 ; Y1.2@24.446,-12.749 C7.2@25.73,-12.547 ; Y1.2@24.448,-12.51 C7.2@25.73,-12.547 ; Y1.2@24.452,-12.425 C7.2@25.73,-12.547 ; Y1.2@24.497,-12.105 C7.2@25.73,-12.547
XOUT: 
XOUTL: C8.2 U1.10 Y1.1 | length 21.5
  Top Layer w0.3: U1.10@18.19,-13.5 19.05,-13.5 ; C8.2@21.148,-10.848 20.443,-12.107 ; C8.2@21.212,-10.785 22.456,-10.094 ; C8.2@21.498,-11.146 22.456,-10.094 ; C8.2@21.509,-11.135 20.443,-12.107 ; Y1.1@23.096,-9.168 21.927,-10.623 ; Y1.1@23.32,-9.68 22.87,-9.68 19.05,-13.5 ; Y1.1@23.41,-9.49 21.927,-10.623 ; Y1.1@23.638,-9.878 21.927,-10.623 ; 19.05,-13.5 18.74,-13.5 19.05,-13.5 ; 20.443,-12.107 C8.2@21.34,-10.977 22.456,-10.094
XTALI: 
XTALO: 
pads on no net: U4.16 U5.4

## Polygon pours and split planes (outlines as drawn)
GND on Top Layer "Bottom Layer-GND" (hatched 45Degree grid 0.2 track 0.2, remove dead copper, pour order 0): 102.25,-26.04 102.36,-25.93 102.36,26.38 -3.22,26.38 -4.32,25.28 -4.49,25.11 -4.49,-26.03 101.9,-26.03 102.08,-25.85
GND on Bottom Layer "Bottom Layer-GND" (hatched 90Degree grid 0.2 track 0.2, remove dead copper, pour order 1001): -64.503,-46.17
GND on Bottom Layer "Bottom Layer-GND" (hatched 45Degree grid 0.2 track 0.2, remove dead copper, pour order 2): 102.11,-26.18 102.21,-26.08 102.21,28.34 -2.73,28.34 -3.23,27.84 -4.52,26.55 -4.52,-26.28 102.1,-26.28 102.16,-26.22

## Keep-outs
Keep-Out Layer:
  circle w0.127: c37.801,-3.453 r1.1
  circle w0.127: c47.351,17.547 r1.1
  circle w0.127: c23.801,7.497 r1.1
  circle w0.127: c66.851,-8.953 r1.1
  circle w0.127: c10.851,-8.953 r1.1
  circle w0.127: c68.301,-3.003 r1.1
  circle w0.127: c68.301,17.097 r1.1
  circle w0.127: c50.901,7.497 r1.1
  circle w0.127: c53.851,23.047 r1.1
  circle w0.127: c10.801,17.547 r1.1
  circle w0.127: c23.851,23.047 r1.1
  circle w0.127: c37.801,-3.453 r1.1
  circle w0.127: c47.351,17.547 r1.1
  circle w0.127: c23.801,7.497 r1.1
  circle w0.127: c50.901,7.497 r1.1
  lines w0.127: 13.851,21.847 13.851,25.547 ; 13.851,21.847 7.851,21.847 -4.44,21.847 -4.44,-25.82 101.817,-25.82 101.817,21.847 69.851,21.847 63.851,21.847 63.851,25.547 13.851,25.547 ; 13.851,21.847 13.851,25.547

## Other copper
Top Layer:
  rectangle net GND: 96.62,-5.13 97.17,-4.47
  rectangle net GND: 29.02,18.69 29.74,19.42
  pour cut-out: 29.17,-18.76 31.37,-20.96 68.76,-20.96 70.63,-19.09 70.63,-13.66 65.171,-8.201 34.318,-8.201 18.448,7.67 9.376,7.67 9.395,8.67 18.948,8.67 34.748,-7.13 65.09,-7.13 71.36,-13.4 71.36,-19.43 69.06,-21.73 31.09,-21.73 29.21,-19.85 22.71,-19.85 22.71,-25.83 21.93,-25.83 21.93,-18.76
  pour cut-out: 28.65,-16.92 29.17,-16.92 29.17,-18.96 28.65,-18.96
Bottom Layer:
  pour cut-out: 30.22,-19.81 31.37,-20.96 68.76,-20.96 70.63,-19.09 70.63,-13.66 65.171,-8.201 34.318,-8.201 18.448,7.67 9.376,7.67 9.395,8.67 18.948,8.67 34.748,-7.13 65.09,-7.13 71.36,-13.4 71.36,-19.43 69.06,-21.73 31.09,-21.73 30.29,-20.93 22.71,-20.93 22.71,-25.83 21.93,-25.83 21.93,-19.81

## Silkscreen, mask and mechanical layers (free items; w line width, h text height)
Top Overlay:
  circle w0.2: c85.546,20.56 r0.504
  rectangle: 32.12,-18.838 41.137,-15.765
  rectangle: 41.56,-18.77 50.577,-15.88
  rectangle: 51.04,-18.81 59.958,-15.79
  rectangle: 60.28,-18.77 69.358,-15.75
  rectangle: -4.44,6 -1.17,14.25
  rectangle: 23.23,-25.82 30.47,-22.8
  rectangle: 73.84,-25.82 80.05,-22.75
  rectangle: 83.41,-25.82 96.83,-22.61
  rectangle: 98.32,-20.45 101.817,-13.38
  text "2018-9-20" at 49.28,-11.81 h1.5
  text "SIC18102 v1" at 33.36,-12.12 h1.5
  text "E+" at 36.06,-14.84 h1.5
  text "S+" at 45.37,-14.89 h1.5
  text "E-" at 54.71,-15.04 h1.5
  text "S-" at 64.27,-15.08 h1.5
  text "R4" at 63.89,-20.58 h1.2
  text "W4" at 60.69,-20.64 h1.2
  text "B4" at 67.08,-20.66 h1.2
  text "R3" at 54.52,-20.71 h1.2
  text "W3" at 57.48,-20.71 h1.2
  text "W2" at 41.95,-20.75 h1.2
  text "B3" at 51.14,-20.74 h1.2
  text "B1" at 32.71,-20.78 h1.2
  text "R1" at 35.87,-20.76 h1.2
  text "R2" at 45.26,-20.77 h1.2
  text "W1" at 38.92,-20.8 h1.2
  text "B2" at 48.09,-20.8 h1.2
Mechanical 7:
  circle w0.006: c206.844,52.863 r0.003
  circle w0.006: c206.844,37.78 r0.003
  circle w0.006: c121.844,37.78 r0.003
  circle w0.006: c82.938,-10.925 r0.003
  circle w0.006: c121.844,8.78 r0.003
  circle w0.006: c215.478,7.28 r0.003
  circle w0.006: c205.344,7.28 r0.003
  circle w0.006: c205.344,39.28 r0.003
  circle w0.006: c85.494,21.28 r0.003
  circle w0.006: c43.348,2.606 r0.003
  circle w0.006: c111.314,-25.4 r0.003
  circle w0.006: c83.994,22.78 r0.003

## Text inside footprints (layer, text, board x,y; h text height)
C48: Top Overlay "+" at -0.569,-26.446 h1
U4: Top Overlay "18" at 97.333,20.332 h0.7